# Altium PCB Lite Carrier for Mu.PcbDoc (part 14 of 15)
Units mm, origin at the board's own origin, x right, y up, seen from the top; angles counter-clockwise.
Board outline 146 x 102 mm, 20 copper layers (F.Cu, F.Mask, B.Cu, B.Mask, In1.Cu, F.SilkS, In2.Cu, B.SilkS, F.Adhes, B.Adhes, F.Paste, B.Paste, Dwgs.User, Cmts.User, Eco1.User, Eco2.User, Edge.Cuts, Margin, B.CrtYd, F.CrtYd); 254 components, 382 nets, 1258 pads, 1020 vias.
Unrouted connection lines stored in the file: 113.
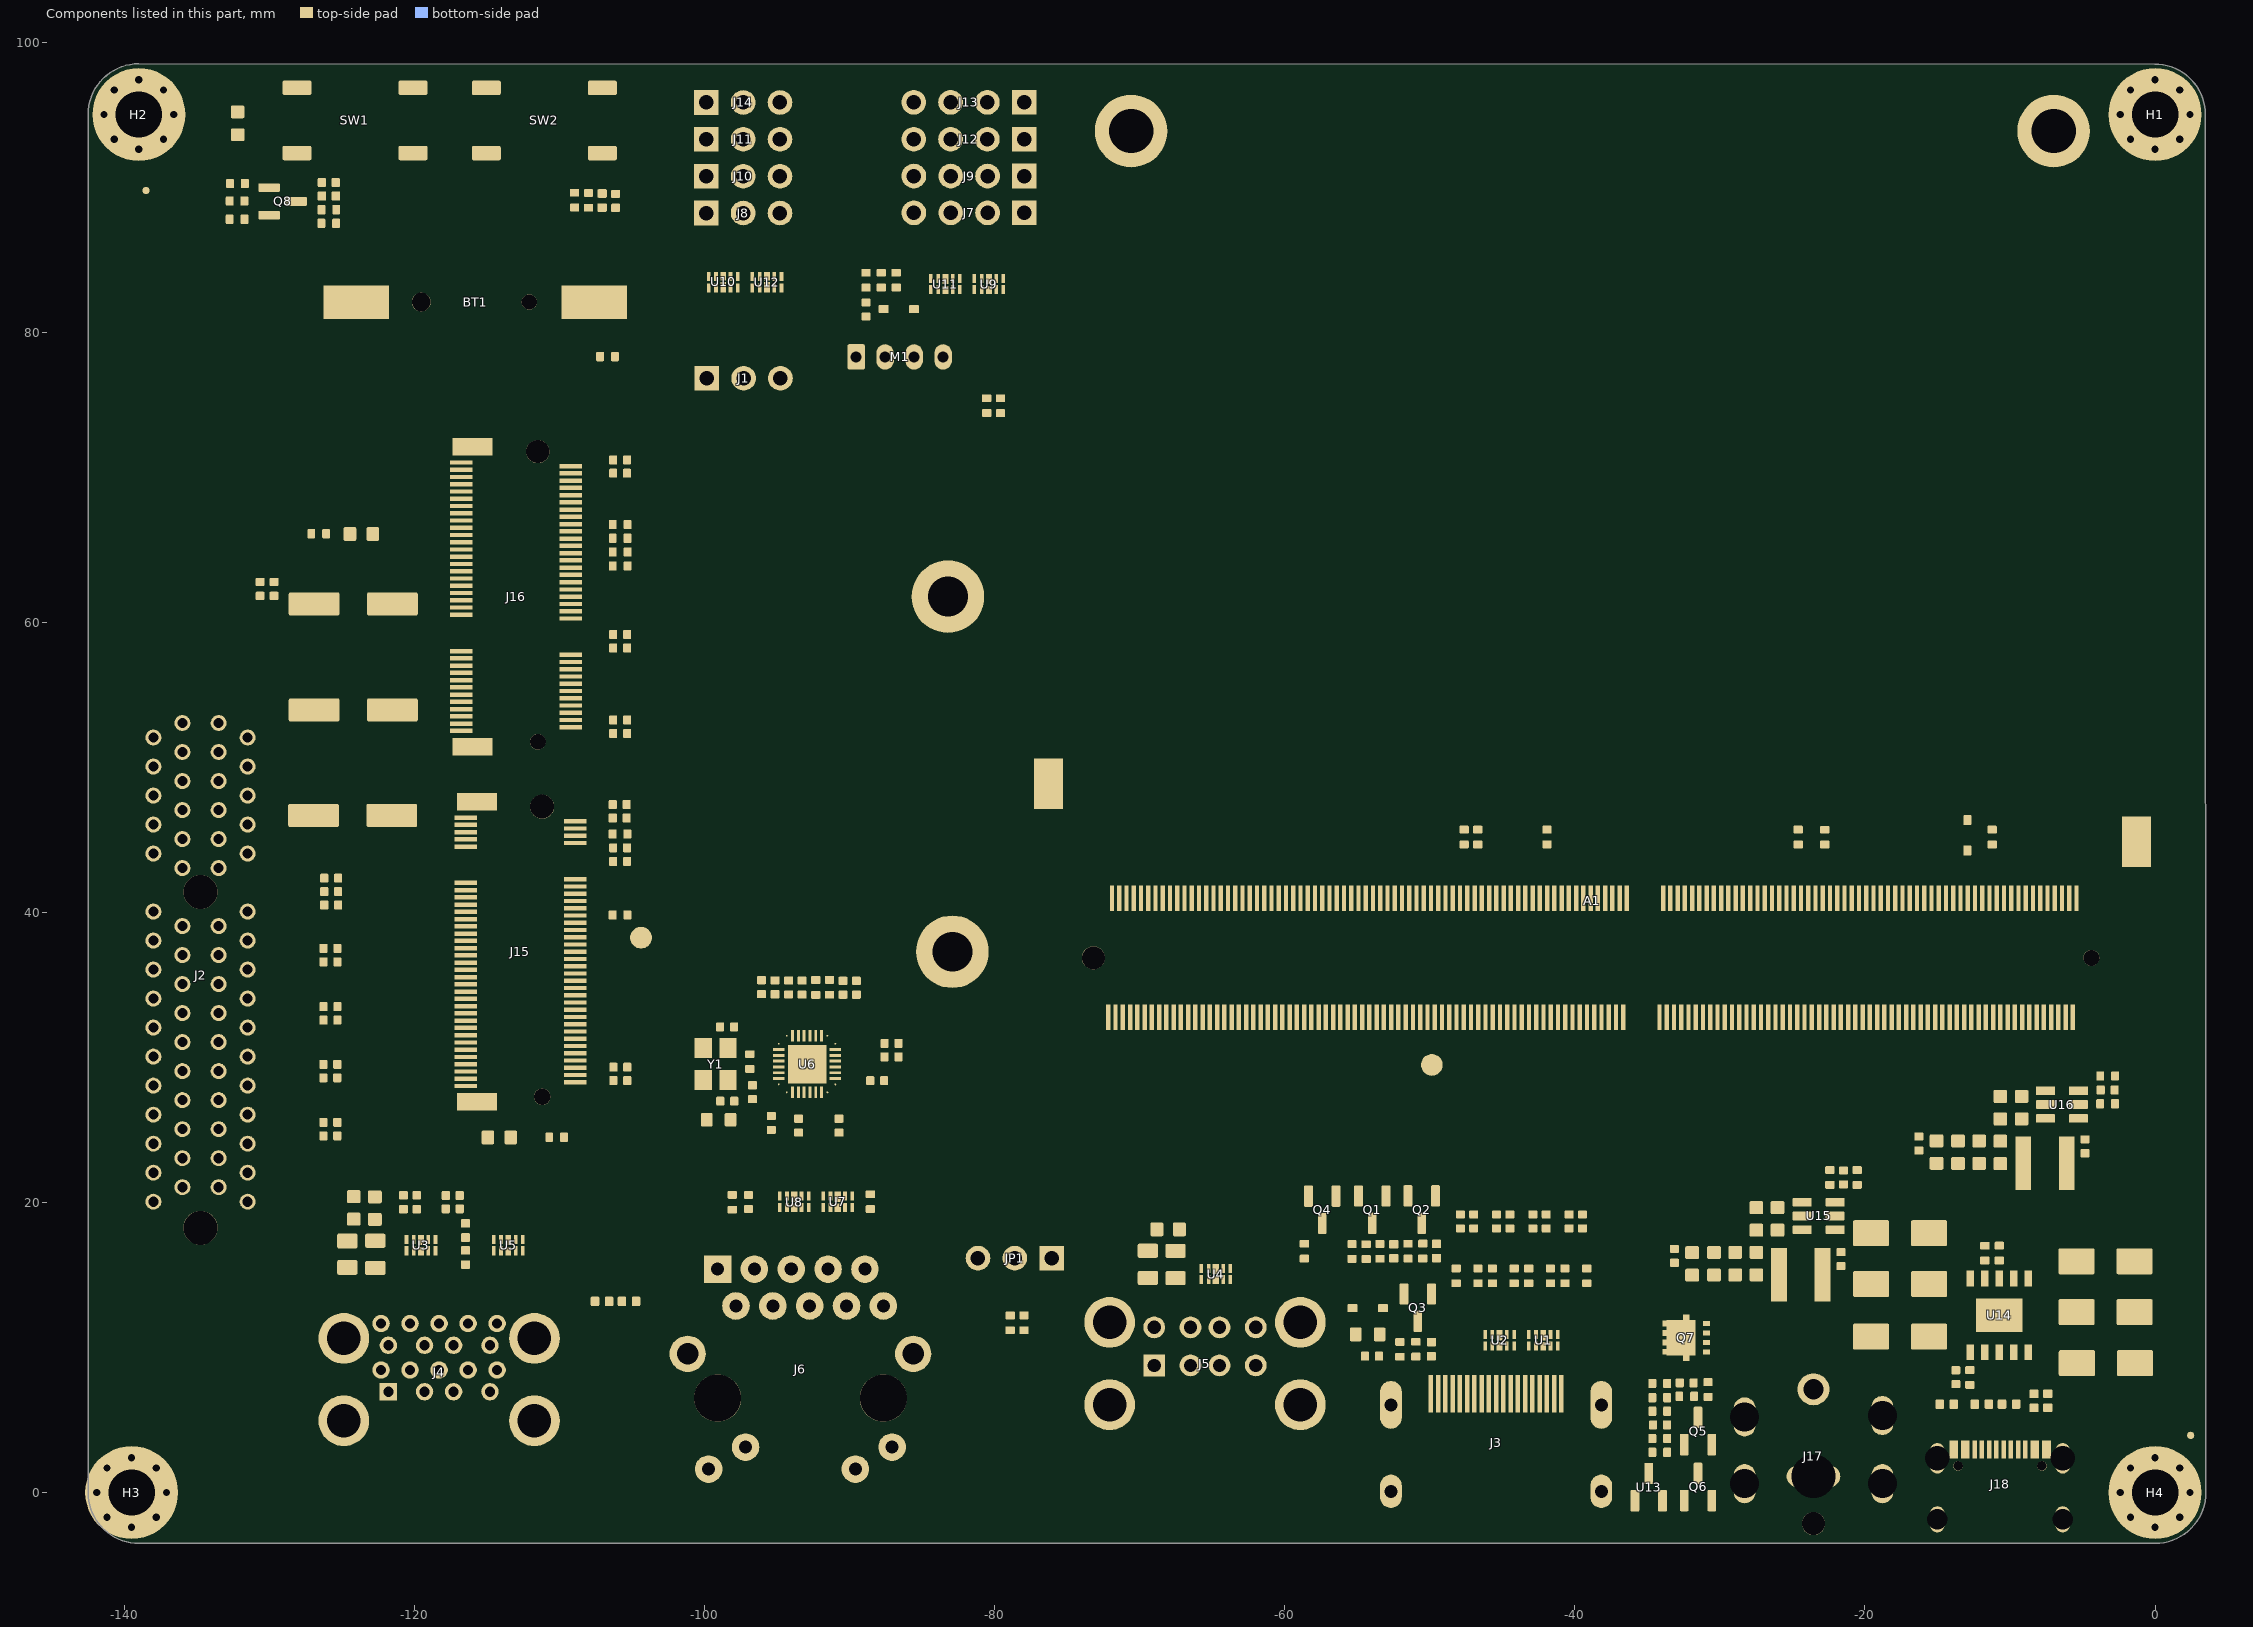
[diagram p24: the components of this part, seen from the top]

## Polygon pours and split planes (outlines as drawn) (continued)
GND on F.Cu "F.Cu-GND-48" (solid, remove dead copper, pour order 31874): 24 vertices, not listed, extent -8.355,33.791 -7.985,34.191
GND on F.Cu "F.Cu-GND-22" (solid, remove dead copper, pour order 31875): 24 vertices, not listed, extent -25.355,33.791 -24.985,34.191
GND on F.Cu "F.Cu-GND-58" (solid, remove dead copper, pour order 31876): 24 vertices, not listed, extent -11.355,33.791 -10.985,34.191
GND on F.Cu "F.Cu-GND-138" (solid, remove dead copper, pour order 31877): 24 vertices, not listed, extent -45.105,41.991 -44.735,42.391
+3V3 on F.Cu "F.Cu-+3V3" (solid, remove dead copper, pour order 31878): 24 vertices, not listed, extent -91.565,35.791 -91.195,36.191
GND on F.Cu "F.Cu-GND-24" (solid, remove dead copper, pour order 31879): 24 vertices, not listed, extent -13.095,41.992 -12.725,42.392
GND on F.Cu "F.Cu-GND-15" (solid, remove dead copper, pour order 31880): 24 vertices, not listed, extent -63.845,34.381 -63.475,34.781
GND on F.Cu "F.Cu-GND-28" (solid, remove dead copper, pour order 31881): 24 vertices, not listed, extent -115.498,67.393 -115.063,67.818
{\R\S\T\_\S\W\}\ on F.Cu "F.Cu-/LattePanda Module/~{RST_SW}" (solid, remove dead copper, pour order 31882): 24 vertices, not listed, extent -103.538,82.013 -103.103,82.438
GND on F.Cu "F.Cu-GND-118" (solid, remove dead copper, pour order 31883): 24 vertices, not listed, extent -60.468,34.152 -60.033,34.577
PWR_EN on F.Cu "F.Cu-/PSU/PWR_EN-6" (solid, remove dead copper, pour order 31884): 24 vertices, not listed, extent -7.725,28.331 -7.355,28.731
GND on F.Cu "F.Cu-GND-89" (solid, remove dead copper, pour order 31885): 24 vertices, not listed, extent -115.252,45.415 -114.849,45.785
+3V3 on F.Cu "F.Cu-+3V3-77" (solid, remove dead copper, pour order 31886): 24 vertices, not listed, extent -49.785,18.319 -49.415,18.718
GND on F.Cu "F.Cu-GND-60" (solid, remove dead copper, pour order 31887): 24 vertices, not listed, extent -116.178,64.815 -115.779,65.185
GND on F.Cu "F.Cu-GND-133" (solid, remove dead copper, pour order 31888): 24 vertices, not listed, extent -108.348,56.585 -107.949,56.955
GND on F.Cu "F.Cu-GND-107" (solid, remove dead copper, pour order 31889): 24 vertices, not listed, extent -116.168,53.835 -115.769,54.205
PWR_C_D- on F.Cu "F.Cu-/PSU/PWR_C_D--4" (solid, remove dead copper, pour order 31890): 24 vertices, not listed, extent -8.935,8.569 -8.565,8.968
GND on F.Cu "F.Cu-GND-160" (solid, remove dead copper, pour order 31891): 24 vertices, not listed, extent -116.178,52.335 -115.779,52.705
CC2 on F.Cu "F.Cu-/PSU/CC2-2" (solid, remove dead copper, pour order 31892): 24 vertices, not listed, extent -8.935,13.789 -8.565,14.188
GND on F.Cu "F.Cu-GND-3" (solid, remove dead copper, pour order 31893): 24 vertices, not listed, extent -115.968,66.335 -115.569,66.705
GND on F.Cu "F.Cu-GND-93" (solid, remove dead copper, pour order 31894): 24 vertices, not listed, extent -116.158,63.335 -115.759,63.705
{\W\A\K\E\}\ on F.Cu "F.Cu-/~{WAKE}-8" (solid, remove dead copper, pour order 31895): 24 vertices, not listed, extent -74.401,47.545 -74.002,47.915
{\C\L\K\R\E\Q\E\}\ on F.Cu "F.Cu-/M.2 E&M Key/~{CLKREQE}" (solid, remove dead copper, pour order 31896): 24 vertices, not listed, extent -107.081,63.685 -106.682,64.055
VPullup on F.Cu "F.Cu-VPullup" (solid, remove dead copper, pour order 31897): 24 vertices, not listed, extent -13.135,46.582 -12.765,46.981
{\P\L\T\_\R\S\T\}\ on F.Cu "F.Cu-/~{PLT_RST}-6" (solid, remove dead copper, pour order 31898): 24 vertices, not listed, extent -51.221,29.305 -50.822,29.675
FAN_1_TAC on F.Cu "F.Cu-/Fan_Temp/FAN_1_TAC-1" (solid, remove dead copper, pour order 31899): 24 vertices, not listed, extent -89.651,82.895 -89.252,83.265
GND on F.Cu "F.Cu-GND-34" (solid, remove dead copper, pour order 31900): 24 vertices, not listed, extent -93.795,24.279 -93.41,24.656
CC1 on F.Cu "F.Cu-/PSU/CC1-5" (solid, remove dead copper, pour order 31901): 24 vertices, not listed, extent -13.455,5.622 -13.085,6.091
GND on F.Cu "F.Cu-GND-92" (solid, remove dead copper, pour order 31902): 24 vertices, not listed, extent -91.18,18.162 -90.733,18.527
GND on F.Cu "F.Cu-GND-112" (solid, remove dead copper, pour order 31903): 24 vertices, not listed, extent -32.352,34.368 -31.933,34.807
{\P\W\R\_\L\E\D\}\{\s\l\a\s\h\}\{PSON} on F.Cu "F.Cu-/~{PWR_LED}{slash}~{PSON}-4" (solid, remove dead copper, pour order 31904): 24 vertices, not listed, extent -58.82,15.549 -58.45,15.947
GND on F.Cu "F.Cu-GND-84" (solid, remove dead copper, pour order 31905): 24 vertices, not listed, extent -62.335,34.383 -61.965,34.781
GND on F.Cu "F.Cu-GND-47" (solid, remove dead copper, pour order 31906): 24 vertices, not listed, extent -68.335,34.383 -67.965,34.781
GND on F.Cu "F.Cu-GND-11" (solid, remove dead copper, pour order 31907): 24 vertices, not listed, extent -47.365,33.643 -46.995,34.041
GND on F.Cu "F.Cu-GND-119" (solid, remove dead copper, pour order 31908): 24 vertices, not listed, extent -66.115,42.273 -65.745,42.671
PWR_C_D- on F.Cu "F.Cu-/PSU/PWR_C_D--2" (solid, remove dead copper, pour order 31909): 24 vertices, not listed, extent -11.655,6.483 -11.285,6.881
FAN_1_TAC on F.Cu "F.Cu-/Fan_Temp/FAN_1_TAC-4" (solid, remove dead copper, pour order 31910): 24 vertices, not listed, extent -85.135,81.814 -84.765,82.271
PWR_EN on F.Cu "F.Cu-/PSU/PWR_EN" (solid, remove dead copper, pour order 31911): 24 vertices, not listed, extent -78.185,7.359 -77.815,7.756
+3V3 on F.Cu "F.Cu-+3V3-29" (solid, remove dead copper, pour order 31912): 24 vertices, not listed, extent -109.125,87.469 -108.755,87.866
+12V on F.Cu "F.Cu-+12V-2" (solid, remove dead copper, pour order 31913): 24 vertices, not listed, extent -35.161,2.568 -34.764,2.937
GND on F.Cu "F.Cu-GND-183" (solid, remove dead copper, pour order 31914): 24 vertices, not listed, extent -101.117,28.954 -100.704,29.397
+3V3 on F.Cu "F.Cu-+3V3-52" (solid, remove dead copper, pour order 31915): 24 vertices, not listed, extent -79.501,74.164 -79.141,74.52
HSIO_8_TX- on F.Cu "F.Cu-/LattePanda Module/HSIO_8_TX--1" (solid, remove dead copper, pour order 31916): 24 vertices, not listed, extent -119.9,29.328 -119.499,29.698
+1V0 on F.Cu "F.Cu-+1V0-13" (solid, remove dead copper, pour order 31917): 24 vertices, not listed, extent -93.744,25.769 -93.251,26.18
I2C2_SCL on F.Cu "F.Cu-/GPIO/I2C2_SCL" (solid, remove dead copper, pour order 31918): 24 vertices, not listed, extent -82.475,81.973 -82.043,82.334
GND on F.Cu "F.Cu-GND-91" (solid, remove dead copper, pour order 31919): 24 vertices, not listed, extent -49.226,8.764 -48.83,9.101
LED2_ACT on F.Cu "F.Cu-/Gigabit Ethernet/LED2_ACT" (solid, remove dead copper, pour order 31920): 24 vertices, not listed, extent -96.21,30.618 -95.835,31.015
LED1_1000 on F.Cu "F.Cu-/Gigabit Ethernet/LED1_1000" (solid, remove dead copper, pour order 31921): 24 vertices, not listed, extent -95.827,30.223 -95.449,30.615
SOC_UART1_RX on F.Cu "F.Cu-/GPIO/SOC_UART1_RX-4" (solid, remove dead copper, pour order 31922): 24 vertices, not listed, extent -99.395,82.089 -99.025,82.49
+1V0 on F.Cu "F.Cu-+1V0-16" (solid, remove dead copper, pour order 31923): 24 vertices, not listed, extent -93.72,26.126 -93.35,26.527
I2C3_SCL on F.Cu "F.Cu-/GPIO/I2C3_SCL-3" (solid, remove dead copper, pour order 31924): 24 vertices, not listed, extent -83.085,82.039 -82.715,82.44
+BATT on F.Cu "F.Cu-+BATT-2" (solid, remove dead copper, pour order 31925): 24 vertices, not listed, extent -60.546,62.233 -60.133,62.646
{\P\W\R\_\L\E\D\}\{\s\l\a\s\h\}\{PSON} on F.Cu "F.Cu-/~{PWR_LED}{slash}~{PSON}-3" (solid, remove dead copper, pour order 31926): 24 vertices, not listed, extent -71.736,71.793 -71.323,72.206
+3V3 on F.Cu "F.Cu-+3V3-9" (solid, remove dead copper, pour order 31927): 24 vertices, not listed, extent -97.206,24.154 -96.793,24.567
{\P\L\T\_\R\S\T\}\ on F.Cu "F.Cu-/~{PLT_RST}" (solid, remove dead copper, pour order 31928): 24 vertices, not listed, extent -92.306,33.014 -91.893,33.427
I2C2_SCL on F.Cu "F.Cu-/GPIO/I2C2_SCL-3" (solid, remove dead copper, pour order 31929): 24 vertices, not listed, extent -82.406,84.244 -81.993,84.657
SOC_UART0_RX on F.Cu "F.Cu-/GPIO/SOC_UART0_RX-3" (solid, remove dead copper, pour order 31930): 24 vertices, not listed, extent -100.317,82.133 -99.904,82.546
+3V3 on F.Cu "F.Cu-+3V3-44" (solid, remove dead copper, pour order 31931): 24 vertices, not listed, extent -96.947,24.413 -96.534,24.826
+1V0 on F.Cu "F.Cu-+1V0-15" (solid, remove dead copper, pour order 31932): 24 vertices, not listed, extent -93.832,33.246 -93.419,33.659
{\P\W\R\_\L\E\D\}\{\s\l\a\s\h\}\{PSON} on F.Cu "F.Cu-/~{PWR_LED}{slash}~{PSON}" (solid, remove dead copper, pour order 31933): 24 vertices, not listed, extent -70.836,34.484 -70.423,34.897
I2C4_SCL on F.Cu "F.Cu-/GPIO/I2C4_SCL-3" (solid, remove dead copper, pour order 31934): 24 vertices, not listed, extent -84.085,82.059 -83.715,82.46
I2C3_SCL on F.Cu "F.Cu-/GPIO/I2C3_SCL-2" (solid, remove dead copper, pour order 31935): 24 vertices, not listed, extent -83.085,84.27 -82.715,84.671
SOC_UART0_TX on F.Cu "F.Cu-/GPIO/SOC_UART0_TX-2" (solid, remove dead copper, pour order 31936): 24 vertices, not listed, extent -96.885,84.63 -96.515,85.031
SOC_UART2_RX on F.Cu "F.Cu-/GPIO/SOC_UART2_RX" (solid, remove dead copper, pour order 31937): 24 vertices, not listed, extent -84.461,79.475 -84.06,79.845
SOC_UART1_TX on F.Cu "F.Cu-/GPIO/SOC_UART1_TX-2" (solid, remove dead copper, pour order 31938): 24 vertices, not listed, extent -60.227,74.274 -59.814,74.687
I2C2_SCL on F.Cu "F.Cu-/GPIO/I2C2_SCL-1" (solid, remove dead copper, pour order 31939): 24 vertices, not listed, extent -58.127,77.014 -57.714,77.427
SOC_UART2_TX on F.Cu "F.Cu-/GPIO/SOC_UART2_TX-3" (solid, remove dead copper, pour order 31940): 24 vertices, not listed, extent -91.297,77.814 -90.884,78.227
SOC_UART0_RX on F.Cu "F.Cu-/GPIO/SOC_UART0_RX-4" (solid, remove dead copper, pour order 31941): 24 vertices, not listed, extent -62.917,72.144 -62.504,72.557
SOC_UART1_RX on F.Cu "F.Cu-/GPIO/SOC_UART1_RX-1" (solid, remove dead copper, pour order 31942): 24 vertices, not listed, extent -62.927,75.814 -62.514,76.227
I2C4_SCL on F.Cu "F.Cu-/GPIO/I2C4_SCL-2" (solid, remove dead copper, pour order 31943): 24 vertices, not listed, extent -60.087,75.674 -59.674,76.087
+1V0 on F.Cu "F.Cu-+1V0-14" (solid, remove dead copper, pour order 31944): 24 vertices, not listed, extent -93.832,33.014 -93.46,33.399
+BATT on F.Cu "F.Cu-+BATT" (solid, remove dead copper, pour order 31945): 24 vertices, not listed, extent -43.855,36.961 -43.485,37.361
{\P\W\R\_\S\W\}\ on F.Cu "F.Cu-/LattePanda Module/~{PWR_SW}-1" (solid, remove dead copper, pour order 31946): 24 vertices, not listed, extent -72.355,34.431 -71.985,34.831
{\P\W\R\_\S\W\}\ on F.Cu "F.Cu-/LattePanda Module/~{PWR_SW}-2" (solid, remove dead copper, pour order 31947): 24 vertices, not listed, extent -123.958,88.245 -123.559,88.615
REFCLK2- on F.Cu "F.Cu-/LattePanda Module/REFCLK2--2" (solid, remove dead copper, pour order 31948): 24 vertices, not listed, extent -46.839,35.728 -46.479,36.069
HSIO_9_TX- on F.Cu "F.Cu-/LattePanda Module/HSIO_9_TX--1" (solid, remove dead copper, pour order 31949): 24 vertices, not listed, extent -120.959,27.972 -120.599,28.313
HSIO_10_TX- on F.Cu "F.Cu-/LattePanda Module/HSIO_10_TX--1" (solid, remove dead copper, pour order 31950): 24 vertices, not listed, extent -122.759,24.958 -122.399,25.299
HSIO_3_TX+ on F.Cu "F.Cu-/LattePanda Module/HSIO_3_TX+-1" (solid, remove dead copper, pour order 31951): 24 vertices, not listed, extent -77.189,54.388 -76.829,54.729
HSIO_1_TX- on F.Cu "F.Cu-/LattePanda Module/HSIO_1_TX--2" (solid, remove dead copper, pour order 31952): 24 vertices, not listed, extent -115.789,19.628 -115.429,19.969
GbE_PCIe_CLK+ on F.Cu "F.Cu-/Gigabit Ethernet/GbE_PCIe_CLK+" (solid, remove dead copper, pour order 31953): 24 vertices, not listed, extent -65.539,38.028 -65.179,38.369
HSIO_3_RX+ on F.Cu "F.Cu-/LattePanda Module/HSIO_3_RX+" (solid, remove dead copper, pour order 31954): 24 vertices, not listed, extent -77.199,55.968 -76.839,56.309
HSIO_3_TX- on F.Cu "F.Cu-/LattePanda Module/HSIO_3_TX-" (solid, remove dead copper, pour order 31955): 24 vertices, not listed, extent -77.189,54.831 -76.829,55.172
HSIO_10_TX+ on F.Cu "F.Cu-/LattePanda Module/HSIO_10_TX+-1" (solid, remove dead copper, pour order 31956): 24 vertices, not listed, extent -122.759,25.401 -122.399,25.742
GbE_PCIe_CLK- on F.Cu "F.Cu-/Gigabit Ethernet/GbE_PCIe_CLK-" (solid, remove dead copper, pour order 31957): 24 vertices, not listed, extent -65.539,38.471 -65.179,38.812
HSIO_3_RX- on F.Cu "F.Cu-/LattePanda Module/HSIO_3_RX--2" (solid, remove dead copper, pour order 31958): 24 vertices, not listed, extent -77.199,56.411 -76.839,56.752
HSIO_9_TX+ on F.Cu "F.Cu-/LattePanda Module/HSIO_9_TX+-1" (solid, remove dead copper, pour order 31959): 24 vertices, not listed, extent -120.959,28.415 -120.599,28.756
HSIO_1_TX+ on F.Cu "F.Cu-/LattePanda Module/HSIO_1_TX+-2" (solid, remove dead copper, pour order 31960): 24 vertices, not listed, extent -115.789,20.071 -115.429,20.412
REFCLK2+ on F.Cu "F.Cu-/LattePanda Module/REFCLK2+-1" (solid, remove dead copper, pour order 31961): 24 vertices, not listed, extent -120.439,38.965 -120.079,39.306
REFCLK2+ on F.Cu "F.Cu-/LattePanda Module/REFCLK2+" (solid, remove dead copper, pour order 31962): 24 vertices, not listed, extent -46.839,36.171 -46.479,36.512
HSIO_0_TX+ on F.Cu "F.Cu-/LattePanda Module/HSIO_0_TX+-2" (solid, remove dead copper, pour order 31963): 24 vertices, not listed, extent -119.289,21.971 -118.929,22.312
HSIO_2_RX+ on F.Cu "F.Cu-/LattePanda Module/HSIO_2_RX+-2" (solid, remove dead copper, pour order 31964): 24 vertices, not listed, extent -112.669,38.331 -112.309,38.672
HSIO_8_TX+ on F.Cu "F.Cu-/LattePanda Module/HSIO_8_TX+" (solid, remove dead copper, pour order 31965): 24 vertices, not listed, extent -119.859,29.815 -119.499,30.156
REFCLK0- on F.Cu "F.Cu-/LattePanda Module/REFCLK0-" (solid, remove dead copper, pour order 31966): 24 vertices, not listed, extent -60.549,48.231 -60.189,48.572
HSIO_0_TX- on F.Cu "F.Cu-/LattePanda Module/HSIO_0_TX-" (solid, remove dead copper, pour order 31967): 24 vertices, not listed, extent -79.521,21.528 -79.161,21.869
HSIO_1_TX- on F.Cu "F.Cu-/LattePanda Module/HSIO_1_TX--1" (solid, remove dead copper, pour order 31968): 24 vertices, not listed, extent -80.501,20.108 -80.141,20.449
USB_2_P7+ on F.Cu "F.Cu-/LattePanda Module/USB_2_P7+-2" (solid, remove dead copper, pour order 31969): 24 vertices, not listed, extent -104.811,48.708 -104.451,49.049
REFCLK0+ on F.Cu "F.Cu-/LattePanda Module/REFCLK0+-2" (solid, remove dead copper, pour order 31970): 24 vertices, not listed, extent -60.549,47.788 -60.189,48.129
HSIO_0_TX- on F.Cu "F.Cu-/LattePanda Module/HSIO_0_TX--2" (solid, remove dead copper, pour order 31971): 24 vertices, not listed, extent -119.289,21.528 -118.929,21.869
HSIO_2_RX- on F.Cu "F.Cu-/LattePanda Module/HSIO_2_RX--2" (solid, remove dead copper, pour order 31972): 24 vertices, not listed, extent -112.669,37.888 -112.309,38.229
REFCLK2- on F.Cu "F.Cu-/LattePanda Module/REFCLK2--1" (solid, remove dead copper, pour order 31973): 24 vertices, not listed, extent -120.439,38.522 -120.079,38.863
HSIO_2_RX- on F.Cu "F.Cu-/LattePanda Module/HSIO_2_RX--1" (solid, remove dead copper, pour order 31974): 24 vertices, not listed, extent -98.751,42.831 -98.391,43.172
HSIO_1_TX+ on F.Cu "F.Cu-/LattePanda Module/HSIO_1_TX+" (solid, remove dead copper, pour order 31975): 24 vertices, not listed, extent -80.501,20.551 -80.141,20.892
HSIO_9_RX- on F.Cu "F.Cu-/LattePanda Module/HSIO_9_RX-" (solid, remove dead copper, pour order 31976): 24 vertices, not listed, extent -60.614,36.389 -60.273,36.749
CON_USB4_D_P on F.Cu "F.Cu-/USB2.0&USB3.0/CON_USB4_D_P" (solid, remove dead copper, pour order 31977): 24 vertices, not listed, extent -115.899,16.742 -115.539,17.083
HSIO_8_RX- on F.Cu "F.Cu-/LattePanda Module/HSIO_8_RX-" (solid, remove dead copper, pour order 31978): 24 vertices, not listed, extent -62.114,36.389 -61.773,36.749
HSIO_2_TX- on F.Cu "F.Cu-/LattePanda Module/HSIO_2_TX--2" (solid, remove dead copper, pour order 31979): 24 vertices, not listed, extent -101.099,43.588 -100.739,43.929
CON_USB3_SSTX_N on F.Cu "F.Cu-/USB2.0&USB3.0/CON_USB3_SSTX_N-3" (solid, remove dead copper, pour order 31980): 24 vertices, not listed, extent -120.249,15.809 -119.908,16.169
CON_USB3_SSRX_N on F.Cu "F.Cu-/USB2.0&USB3.0/CON_USB3_SSRX_N-4" (solid, remove dead copper, pour order 31981): 24 vertices, not listed, extent -114.229,15.489 -113.888,15.849
HSIO_11_RX- on F.Cu "F.Cu-/LattePanda Module/HSIO_11_RX-" (solid, remove dead copper, pour order 31982): 24 vertices, not listed, extent -57.614,36.389 -57.273,36.749
GbE_PCIe_RX+ on F.Cu "F.Cu-/Gigabit Ethernet/GbE_PCIe_RX+-1" (solid, remove dead copper, pour order 31983): 24 vertices, not listed, extent -80.339,44.619 -79.998,44.979
HSIO_10_RX- on F.Cu "F.Cu-/LattePanda Module/HSIO_10_RX-" (solid, remove dead copper, pour order 31984): 24 vertices, not listed, extent -59.114,36.389 -58.773,36.749
USB_2_P7+ on F.Cu "F.Cu-/LattePanda Module/USB_2_P7+-1" (solid, remove dead copper, pour order 31985): 24 vertices, not listed, extent -115.369,52.868 -115.009,53.209
REFCLK0- on F.Cu "F.Cu-/LattePanda Module/REFCLK0--2" (solid, remove dead copper, pour order 31986): 24 vertices, not listed, extent -49.663,38.535 -49.267,38.909
USB_2_P7- on F.Cu "F.Cu-/LattePanda Module/USB_2_P7-" (solid, remove dead copper, pour order 31987): 24 vertices, not listed, extent -115.369,53.311 -115.009,53.652
HSIO_2_TX+ on F.Cu "F.Cu-/LattePanda Module/HSIO_2_TX+-2" (solid, remove dead copper, pour order 31988): 24 vertices, not listed, extent -101.099,44.031 -100.739,44.372
GbE_PCIe_RX- on F.Cu "F.Cu-/Gigabit Ethernet/GbE_PCIe_RX-" (solid, remove dead copper, pour order 31989): 24 vertices, not listed, extent -80.782,44.619 -80.441,44.979
HSIO_10_RX+ on F.Cu "F.Cu-/LattePanda Module/HSIO_10_RX+" (solid, remove dead copper, pour order 31990): 24 vertices, not listed, extent -59.557,36.389 -59.216,36.749
CON_USB4_D_N on F.Cu "F.Cu-/USB2.0&USB3.0/CON_USB4_D_N-3" (solid, remove dead copper, pour order 31991): 24 vertices, not listed, extent -115.899,17.185 -115.539,17.526
CON_USB3_SSTX_P on F.Cu "F.Cu-/USB2.0&USB3.0/CON_USB3_SSTX_P-2" (solid, remove dead copper, pour order 31992): 24 vertices, not listed, extent -120.692,15.809 -120.351,16.169
CON_USB3_SSRX_P on F.Cu "F.Cu-/USB2.0&USB3.0/CON_USB3_SSRX_P-1" (solid, remove dead copper, pour order 31993): 24 vertices, not listed, extent -114.672,15.489 -114.331,15.849
HSIO_11_RX+ on F.Cu "F.Cu-/LattePanda Module/HSIO_11_RX+" (solid, remove dead copper, pour order 31994): 24 vertices, not listed, extent -58.057,36.389 -57.716,36.749
HSIO_9_RX+ on F.Cu "F.Cu-/LattePanda Module/HSIO_9_RX+" (solid, remove dead copper, pour order 31995): 24 vertices, not listed, extent -61.057,36.389 -60.716,36.749
HSIO_8_RX+ on F.Cu "F.Cu-/LattePanda Module/HSIO_8_RX+" (solid, remove dead copper, pour order 31996): 24 vertices, not listed, extent -62.557,36.389 -62.216,36.749
HSIO_2_TX- on F.Cu "F.Cu-/LattePanda Module/HSIO_2_TX--1" (solid, remove dead copper, pour order 31997): 24 vertices, not listed, extent -65.864,36.991 -65.523,37.351
CON_USB3_D_N on F.Cu "F.Cu-/USB2.0&USB3.0/CON_USB3_D_N-3" (solid, remove dead copper, pour order 31998): 24 vertices, not listed, extent -106.089,13.971 -105.748,14.331
CON_USB4_D_P on F.Cu "F.Cu-/USB2.0&USB3.0/CON_USB4_D_P-1" (solid, remove dead copper, pour order 31999): 24 vertices, not listed, extent -83.171,18.708 -82.811,19.049
HSIO_3_RX- on F.Cu "F.Cu-/LattePanda Module/HSIO_3_RX--1" (solid, remove dead copper, pour order 32000): 24 vertices, not listed, extent -63.614,42.181 -63.273,42.541
GbE_PCIe_RX+ on F.Cu "F.Cu-/Gigabit Ethernet/GbE_PCIe_RX+" (solid, remove dead copper, pour order 32001): 24 vertices, not listed, extent -89.944,38.281 -89.603,38.641
HSIO_2_RX+ on F.Cu "F.Cu-/LattePanda Module/HSIO_2_RX+" (solid, remove dead copper, pour order 32002): 24 vertices, not listed, extent -98.751,42.388 -98.391,42.729
HSIO_3_TX- on F.Cu "F.Cu-/LattePanda Module/HSIO_3_TX--2" (solid, remove dead copper, pour order 32003): 24 vertices, not listed, extent -64.364,38.801 -64.023,39.161
CON_USB3_D_P on F.Cu "F.Cu-/USB2.0&USB3.0/CON_USB3_D_P-3" (solid, remove dead copper, pour order 32004): 24 vertices, not listed, extent -84.481,17.428 -84.121,17.769
REFCLK0+ on F.Cu "F.Cu-/LattePanda Module/REFCLK0+" (solid, remove dead copper, pour order 32005): 24 vertices, not listed, extent -49.855,38.727 -49.481,39.123
GbE_PCIe_CLK- on F.Cu "F.Cu-/Gigabit Ethernet/GbE_PCIe_CLK--1" (solid, remove dead copper, pour order 32006): 24 vertices, not listed, extent -49.039,42.747 -48.665,43.143
GbE_PCIe_CLK+ on F.Cu "F.Cu-/Gigabit Ethernet/GbE_PCIe_CLK+-1" (solid, remove dead copper, pour order 32007): 24 vertices, not listed, extent -49.253,42.555 -48.857,42.929
CON_USB4_D_N on F.Cu "F.Cu-/USB2.0&USB3.0/CON_USB4_D_N-4" (solid, remove dead copper, pour order 32008): 24 vertices, not listed, extent -83.171,19.151 -82.811,19.492
USB_2_P7- on F.Cu "F.Cu-/LattePanda Module/USB_2_P7--1" (solid, remove dead copper, pour order 32009): 24 vertices, not listed, extent -104.811,49.151 -104.451,49.492
HSIO_2_TX+ on F.Cu "F.Cu-/LattePanda Module/HSIO_2_TX+" (solid, remove dead copper, pour order 32010): 24 vertices, not listed, extent -66.307,36.991 -65.966,37.351
HSIO_3_RX+ on F.Cu "F.Cu-/LattePanda Module/HSIO_3_RX+-1" (solid, remove dead copper, pour order 32011): 24 vertices, not listed, extent -64.057,42.181 -63.716,42.541
HSIO_3_TX+ on F.Cu "F.Cu-/LattePanda Module/HSIO_3_TX+-2" (solid, remove dead copper, pour order 32012): 24 vertices, not listed, extent -64.807,38.801 -64.466,39.161
HSIO_0_TX+ on F.Cu "F.Cu-/LattePanda Module/HSIO_0_TX+" (solid, remove dead copper, pour order 32013): 24 vertices, not listed, extent -79.521,21.971 -79.161,22.312
CON_USB3_D_P on F.Cu "F.Cu-/USB2.0&USB3.0/CON_USB3_D_P-4" (solid, remove dead copper, pour order 32014): 24 vertices, not listed, extent -106.532,13.971 -106.191,14.331
CON_USB3_D_N on F.Cu "F.Cu-/USB2.0&USB3.0/CON_USB3_D_N-4" (solid, remove dead copper, pour order 32015): 24 vertices, not listed, extent -84.481,17.871 -84.121,18.212
GbE_PCIe_RX- on F.Cu "F.Cu-/Gigabit Ethernet/GbE_PCIe_RX--1" (solid, remove dead copper, pour order 32016): 24 vertices, not listed, extent -90.387,38.281 -90.046,38.641
SOC_UART0_TX on F.Cu "F.Cu-/GPIO/SOC_UART0_TX-3" (solid, remove dead copper, pour order 32017): 24 vertices, not listed, extent -64.707,76.286 -64.306,76.707
SOC_UART2_RX on F.Cu "F.Cu-/GPIO/SOC_UART2_RX-4" (solid, remove dead copper, pour order 32018): 24 vertices, not listed, extent -98.375,80.869 -98.005,81.266
SOC_UART0_TX on F.Cu "F.Cu-/GPIO/SOC_UART0_TX-1" (solid, remove dead copper, pour order 32019): 24 vertices, not listed, extent -96.905,81.669 -96.535,82.066
I2C3_SCL on F.Cu "F.Cu-/GPIO/I2C3_SCL-4" (solid, remove dead copper, pour order 32020): 24 vertices, not listed, extent -59.157,76.312 -58.762,76.737
SOC_UART1_TX on F.Cu "F.Cu-/GPIO/SOC_UART1_TX" (solid, remove dead copper, pour order 32021): 24 vertices, not listed, extent -96.362,82.132 -95.992,82.529
+1V0 on F.Cu "F.Cu-+1V0-12" (solid, remove dead copper, pour order 32022): 24 vertices, not listed, extent -90.92,25.77 -90.55,26.128
{\R\S\T\_\S\W\}\ on F.Cu "F.Cu-/LattePanda Module/~{RST_SW}-1" (solid, remove dead copper, pour order 32023): 24 vertices, not listed, extent -71.805,34.427 -71.436,34.819
GND on F.Cu "F.Cu-GND-20" (solid, remove dead copper, pour order 32024): 24 vertices, not listed, extent -23.265,33.915 -22.903,34.267
GND on F.Cu "F.Cu-GND-21" (solid, remove dead copper, pour order 32025): 24 vertices, not listed, extent -49.733,15.06 -49.335,15.59
CON_USB4_SSRX_N on F.Cu "F.Cu-/USB2.0&USB3.0/CON_USB4_SSRX_N-4" (solid, remove dead copper, pour order 32026): 24 vertices, not listed, extent -112.729,16.232 -112.482,16.687
CON_USB4_SSRX_N on F.Cu "F.Cu-/USB2.0&USB3.0/CON_USB4_SSRX_N" (solid, remove dead copper, pour order 32027): 24 vertices, not listed, extent -112.729,17.007 -112.482,17.462
CON_USB2_D_P on F.Cu "F.Cu-/USB2.0&USB3.0/CON_USB2_D_P-1" (solid, remove dead copper, pour order 32028): 24 vertices, not listed, extent -65.449,15.017 -65.202,15.472
CON_USB3_SSRX_N on F.Cu "F.Cu-/USB2.0&USB3.0/CON_USB3_SSRX_N-2" (solid, remove dead copper, pour order 32029): 24 vertices, not listed, extent -114.229,17.007 -113.982,17.462
CON_USB4_SSTX_N on F.Cu "F.Cu-/USB2.0&USB3.0/CON_USB4_SSTX_N-5" (solid, remove dead copper, pour order 32030): 24 vertices, not listed, extent -118.749,16.232 -118.502,16.687
CON_USB4_SSTX_N on F.Cu "F.Cu-/USB2.0&USB3.0/CON_USB4_SSTX_N-4" (solid, remove dead copper, pour order 32031): 24 vertices, not listed, extent -118.749,17.007 -118.502,17.462
CON_USB3_SSTX_N on F.Cu "F.Cu-/USB2.0&USB3.0/CON_USB3_SSTX_N-2" (solid, remove dead copper, pour order 32032): 24 vertices, not listed, extent -120.249,17.007 -120.002,17.462
CON_USB1_D_P on F.Cu "F.Cu-/USB2.0&USB3.0/CON_USB1_D_P-3" (solid, remove dead copper, pour order 32033): 24 vertices, not listed, extent -63.949,15.017 -63.702,15.472
CON_USB2_D_P on F.Cu "F.Cu-/USB2.0&USB3.0/CON_USB2_D_P" (solid, remove dead copper, pour order 32034): 24 vertices, not listed, extent -65.449,14.242 -65.202,14.697
CON_USB1_D_P on F.Cu "F.Cu-/USB2.0&USB3.0/CON_USB1_D_P-4" (solid, remove dead copper, pour order 32035): 24 vertices, not listed, extent -63.949,14.242 -63.702,14.697
CON_USB4_SSRX_N on F.Cu "F.Cu-/USB2.0&USB3.0/CON_USB4_SSRX_N-1" (solid, remove dead copper, pour order 32036): 24 vertices, not listed, extent -112.729,17.428 -112.482,17.882
CON_USB3_SSRX_N on F.Cu "F.Cu-/USB2.0&USB3.0/CON_USB3_SSRX_N-3" (solid, remove dead copper, pour order 32037): 24 vertices, not listed, extent -114.229,17.428 -113.982,17.882
CON_USB3_SSTX_N on F.Cu "F.Cu-/USB2.0&USB3.0/CON_USB3_SSTX_N-4" (solid, remove dead copper, pour order 32038): 24 vertices, not listed, extent -120.249,17.428 -120.002,17.882
CON_USB4_SSTX_N on F.Cu "F.Cu-/USB2.0&USB3.0/CON_USB4_SSTX_N-3" (solid, remove dead copper, pour order 32039): 24 vertices, not listed, extent -118.749,16.653 -118.502,17.107
CON_USB2_D_P on F.Cu "F.Cu-/USB2.0&USB3.0/CON_USB2_D_P-4" (solid, remove dead copper, pour order 32040): 24 vertices, not listed, extent -65.449,14.663 -65.202,15.118
CON_USB4_SSRX_N on F.Cu "F.Cu-/USB2.0&USB3.0/CON_USB4_SSRX_N-2" (solid, remove dead copper, pour order 32041): 24 vertices, not listed, extent -112.729,16.653 -112.482,17.107
CON_USB2_D_P on F.Cu "F.Cu-/USB2.0&USB3.0/CON_USB2_D_P-3" (solid, remove dead copper, pour order 32042): 24 vertices, not listed, extent -65.449,15.438 -65.202,15.893
CON_USB4_SSTX_N on F.Cu "F.Cu-/USB2.0&USB3.0/CON_USB4_SSTX_N" (solid, remove dead copper, pour order 32043): 24 vertices, not listed, extent -118.749,17.428 -118.502,17.882
CON_USB3_SSTX_N on F.Cu "F.Cu-/USB2.0&USB3.0/CON_USB3_SSTX_N-1" (solid, remove dead copper, pour order 32044): 24 vertices, not listed, extent -120.249,16.653 -120.002,17.107
CON_USB1_D_P on F.Cu "F.Cu-/USB2.0&USB3.0/CON_USB1_D_P-2" (solid, remove dead copper, pour order 32045): 24 vertices, not listed, extent -63.949,14.663 -63.702,15.118
CON_USB1_D_P on F.Cu "F.Cu-/USB2.0&USB3.0/CON_USB1_D_P-1" (solid, remove dead copper, pour order 32046): 24 vertices, not listed, extent -63.949,15.438 -63.702,15.893
CON_USB3_SSRX_N on F.Cu "F.Cu-/USB2.0&USB3.0/CON_USB3_SSRX_N" (solid, remove dead copper, pour order 32047): 24 vertices, not listed, extent -114.229,16.653 -113.982,17.107
CON_USB1_D_N on F.Cu "F.Cu-/USB2.0&USB3.0/CON_USB1_D_N-1" (solid, remove dead copper, pour order 32048): 24 vertices, not listed, extent -64.298,15.017 -64.051,15.472
CON_USB4_SSRX_P on F.Cu "F.Cu-/USB2.0&USB3.0/CON_USB4_SSRX_P-1" (solid, remove dead copper, pour order 32049): 24 vertices, not listed, extent -113.078,16.232 -112.831,16.687
CON_USB3_SSTX_P on F.Cu "F.Cu-/USB2.0&USB3.0/CON_USB3_SSTX_P-4" (solid, remove dead copper, pour order 32050): 24 vertices, not listed, extent -120.598,17.007 -120.351,17.462
CON_USB2_D_N on F.Cu "F.Cu-/USB2.0&USB3.0/CON_USB2_D_N-2" (solid, remove dead copper, pour order 32051): 24 vertices, not listed, extent -65.798,15.017 -65.551,15.472
CON_USB2_D_N on F.Cu "F.Cu-/USB2.0&USB3.0/CON_USB2_D_N" (solid, remove dead copper, pour order 32052): 24 vertices, not listed, extent -65.798,14.242 -65.551,14.697
CON_USB1_D_N on F.Cu "F.Cu-/USB2.0&USB3.0/CON_USB1_D_N-3" (solid, remove dead copper, pour order 32053): 24 vertices, not listed, extent -64.298,14.242 -64.051,14.697
CON_USB4_SSTX_P on F.Cu "F.Cu-/USB2.0&USB3.0/CON_USB4_SSTX_P-1" (solid, remove dead copper, pour order 32054): 24 vertices, not listed, extent -119.098,17.007 -118.851,17.462
CON_USB3_SSRX_P on F.Cu "F.Cu-/USB2.0&USB3.0/CON_USB3_SSRX_P-4" (solid, remove dead copper, pour order 32055): 24 vertices, not listed, extent -114.578,17.007 -114.331,17.462
CON_USB4_SSRX_P on F.Cu "F.Cu-/USB2.0&USB3.0/CON_USB4_SSRX_P-3" (solid, remove dead copper, pour order 32056): 24 vertices, not listed, extent -113.078,17.007 -112.831,17.462
CON_USB4_SSTX_P on F.Cu "F.Cu-/USB2.0&USB3.0/CON_USB4_SSTX_P-3" (solid, remove dead copper, pour order 32057): 24 vertices, not listed, extent -119.098,16.232 -118.851,16.687
CON_USB3_SSTX_N on F.Cu "F.Cu-/USB2.0&USB3.0/CON_USB3_SSTX_N-5" (solid, remove dead copper, pour order 32058): 24 vertices, not listed, extent -120.249,16.232 -120.002,16.687
CON_USB3_SSRX_N on F.Cu "F.Cu-/USB2.0&USB3.0/CON_USB3_SSRX_N-1" (solid, remove dead copper, pour order 32059): 24 vertices, not listed, extent -114.229,16.232 -113.982,16.687
CON_USB2_D_N on F.Cu "F.Cu-/USB2.0&USB3.0/CON_USB2_D_N-1" (solid, remove dead copper, pour order 32060): 24 vertices, not listed, extent -65.798,15.438 -65.551,15.893
CON_USB1_D_N on F.Cu "F.Cu-/USB2.0&USB3.0/CON_USB1_D_N" (solid, remove dead copper, pour order 32061): 24 vertices, not listed, extent -64.298,15.438 -64.051,15.893
CON_USB3_SSRX_P on F.Cu "F.Cu-/USB2.0&USB3.0/CON_USB3_SSRX_P-2" (solid, remove dead copper, pour order 32062): 24 vertices, not listed, extent -114.578,17.428 -114.331,17.882
CON_USB2_D_N on F.Cu "F.Cu-/USB2.0&USB3.0/CON_USB2_D_N-3" (solid, remove dead copper, pour order 32063): 24 vertices, not listed, extent -65.798,14.663 -65.551,15.118
CON_USB4_SSRX_P on F.Cu "F.Cu-/USB2.0&USB3.0/CON_USB4_SSRX_P-4" (solid, remove dead copper, pour order 32064): 24 vertices, not listed, extent -113.078,16.653 -112.831,17.107
CON_USB3_SSTX_P on F.Cu "F.Cu-/USB2.0&USB3.0/CON_USB3_SSTX_P-3" (solid, remove dead copper, pour order 32065): 24 vertices, not listed, extent -120.598,16.653 -120.351,17.107
CON_USB1_D_N on F.Cu "F.Cu-/USB2.0&USB3.0/CON_USB1_D_N-2" (solid, remove dead copper, pour order 32066): 24 vertices, not listed, extent -64.298,14.663 -64.051,15.118
CON_USB3_SSRX_P on F.Cu "F.Cu-/USB2.0&USB3.0/CON_USB3_SSRX_P" (solid, remove dead copper, pour order 32067): 24 vertices, not listed, extent -114.578,16.653 -114.331,17.107
CON_USB3_SSTX_P on F.Cu "F.Cu-/USB2.0&USB3.0/CON_USB3_SSTX_P" (solid, remove dead copper, pour order 32068): 24 vertices, not listed, extent -120.598,17.428 -120.351,17.882
CON_USB4_SSRX_P on F.Cu "F.Cu-/USB2.0&USB3.0/CON_USB4_SSRX_P" (solid, remove dead copper, pour order 32069): 24 vertices, not listed, extent -113.078,17.428 -112.831,17.882
CON_USB4_SSTX_P on F.Cu "F.Cu-/USB2.0&USB3.0/CON_USB4_SSTX_P" (solid, remove dead copper, pour order 32070): 24 vertices, not listed, extent -119.098,16.653 -118.851,17.107
CON_USB4_SSTX_P on F.Cu "F.Cu-/USB2.0&USB3.0/CON_USB4_SSTX_P-5" (solid, remove dead copper, pour order 32071): 24 vertices, not listed, extent -119.098,17.428 -118.851,17.882
CON_USB3_SSRX_P on F.Cu "F.Cu-/USB2.0&USB3.0/CON_USB3_SSRX_P-3" (solid, remove dead copper, pour order 32072): 24 vertices, not listed, extent -114.578,16.232 -114.331,16.687
CON_USB3_SSTX_P on F.Cu "F.Cu-/USB2.0&USB3.0/CON_USB3_SSTX_P-1" (solid, remove dead copper, pour order 32073): 24 vertices, not listed, extent -120.598,16.232 -120.351,16.687
GND on F.Cu "F.Cu-GND-40" (solid, remove dead copper, pour order 32074): 24 vertices, not listed, extent -90.81,24.309 -90.409,24.633
Net-(Q7-G) on F.Cu "F.Cu-Net-(Q7-G)" (solid, remove dead copper, pour order 32075): 24 vertices, not listed, extent -31.09,11.649 -30.74,12
+12V on F.Cu "F.Cu-+12V" (solid, remove dead copper, pour order 32076): 24 vertices, not listed, extent -31.095,9.35 -30.745,9.701
HSO- on F.Cu "F.Cu-/Gigabit Ethernet/HSO-" (solid, remove dead copper, pour order 32077): 24 vertices, not listed, extent -91.984,31.482 -91.786,31.987
HSI- on F.Cu "F.Cu-/Gigabit Ethernet/HSI--1" (solid, remove dead copper, pour order 32078): 24 vertices, not listed, extent -90.992,29.991 -90.488,30.189
GbE_PCIe_CLK+ on F.Cu "F.Cu-/Gigabit Ethernet/GbE_PCIe_CLK+-2" (solid, remove dead copper, pour order 32079): 24 vertices, not listed, extent -90.992,30.49 -90.488,30.689
HSI+ on F.Cu "F.Cu-/Gigabit Ethernet/HSI+-1" (solid, remove dead copper, pour order 32080): 24 vertices, not listed, extent -90.992,29.69 -90.488,29.889
TMDS_CK- on F.Cu "F.Cu-/HDMI/TMDS_CK--3" (solid, remove dead copper, pour order 32081): 24 vertices, not listed, extent -46.315,10.109 -46.065,10.547
TMDS_CK+ on F.Cu "F.Cu-/HDMI/TMDS_CK+-2" (solid, remove dead copper, pour order 32082): 24 vertices, not listed, extent -45.815,10.884 -45.565,11.322
TMDS_CK+ on F.Cu "F.Cu-/HDMI/TMDS_CK+" (solid, remove dead copper, pour order 32083): 24 vertices, not listed, extent -45.815,10.109 -45.565,10.547
TMDS_D2+ on F.Cu "F.Cu-/HDMI/TMDS_D2+-7" (solid, remove dead copper, pour order 32084): 24 vertices, not listed, extent -41.305,10.109 -41.055,10.547
TMDS_D0+ on F.Cu "F.Cu-/HDMI/TMDS_D0+-3" (solid, remove dead copper, pour order 32085): 24 vertices, not listed, extent -44.315,10.884 -44.065,11.322
TMDS_D1+ on F.Cu "F.Cu-/HDMI/TMDS_D1+-3" (solid, remove dead copper, pour order 32086): 24 vertices, not listed, extent -42.805,10.884 -42.555,11.322
TMDS_D1- on F.Cu "F.Cu-/HDMI/TMDS_D1--3" (solid, remove dead copper, pour order 32087): 24 vertices, not listed, extent -43.305,10.884 -43.055,11.322
TMDS_D2- on F.Cu "F.Cu-/HDMI/TMDS_D2-" (solid, remove dead copper, pour order 32088): 24 vertices, not listed, extent -41.805,10.884 -41.555,11.322
TMDS_D0- on F.Cu "F.Cu-/HDMI/TMDS_D0--3" (solid, remove dead copper, pour order 32089): 24 vertices, not listed, extent -44.815,10.109 -44.565,10.547
TMDS_D1- on F.Cu "F.Cu-/HDMI/TMDS_D1--4" (solid, remove dead copper, pour order 32090): 24 vertices, not listed, extent -43.305,10.109 -43.055,10.547
TMDS_D2+ on F.Cu "F.Cu-/HDMI/TMDS_D2+-3" (solid, remove dead copper, pour order 32091): 24 vertices, not listed, extent -41.305,10.884 -41.055,11.322
TMDS_D2- on F.Cu "F.Cu-/HDMI/TMDS_D2--1" (solid, remove dead copper, pour order 32092): 24 vertices, not listed, extent -41.805,10.109 -41.555,10.547
TMDS_D0- on F.Cu "F.Cu-/HDMI/TMDS_D0--4" (solid, remove dead copper, pour order 32093): 24 vertices, not listed, extent -44.815,10.884 -44.565,11.322
TMDS_D1+ on F.Cu "F.Cu-/HDMI/TMDS_D1+-2" (solid, remove dead copper, pour order 32094): 24 vertices, not listed, extent -42.805,10.109 -42.555,10.547
TMDS_D0+ on F.Cu "F.Cu-/HDMI/TMDS_D0+-1" (solid, remove dead copper, pour order 32095): 24 vertices, not listed, extent -44.315,10.109 -44.065,10.547
TMDS_CK- on F.Cu "F.Cu-/HDMI/TMDS_CK--6" (solid, remove dead copper, pour order 32096): 24 vertices, not listed, extent -46.315,10.884 -46.065,11.322
TMDS_D2+ on F.Cu "F.Cu-/HDMI/TMDS_D2+-5" (solid, remove dead copper, pour order 32097): 24 vertices, not listed, extent -41.305,9.673 -41.055,10.111
TMDS_D1- on F.Cu "F.Cu-/HDMI/TMDS_D1--1" (solid, remove dead copper, pour order 32098): 24 vertices, not listed, extent -43.305,10.448 -43.055,10.886
TMDS_D2+ on F.Cu "F.Cu-/HDMI/TMDS_D2+-6" (solid, remove dead copper, pour order 32099): 24 vertices, not listed, extent -41.305,10.448 -41.055,10.886
TMDS_D1+ on F.Cu "F.Cu-/HDMI/TMDS_D1+-1" (solid, remove dead copper, pour order 32100): 24 vertices, not listed, extent -42.805,10.448 -42.555,10.886
TMDS_CK+ on F.Cu "F.Cu-/HDMI/TMDS_CK+-7" (solid, remove dead copper, pour order 32101): 24 vertices, not listed, extent -45.815,9.673 -45.565,10.111
TMDS_D1- on F.Cu "F.Cu-/HDMI/TMDS_D1-" (solid, remove dead copper, pour order 32102): 24 vertices, not listed, extent -43.305,9.673 -43.055,10.111
TMDS_CK+ on F.Cu "F.Cu-/HDMI/TMDS_CK+-4" (solid, remove dead copper, pour order 32103): 24 vertices, not listed, extent -45.815,10.448 -45.565,10.886
TMDS_D0+ on F.Cu "F.Cu-/HDMI/TMDS_D0+-6" (solid, remove dead copper, pour order 32104): 24 vertices, not listed, extent -44.315,9.673 -44.065,10.111
TMDS_D0+ on F.Cu "F.Cu-/HDMI/TMDS_D0+-7" (solid, remove dead copper, pour order 32105): 24 vertices, not listed, extent -44.315,10.448 -44.065,10.886
TMDS_D0- on F.Cu "F.Cu-/HDMI/TMDS_D0--1" (solid, remove dead copper, pour order 32106): 24 vertices, not listed, extent -44.815,10.448 -44.565,10.886
TMDS_CK- on F.Cu "F.Cu-/HDMI/TMDS_CK--1" (solid, remove dead copper, pour order 32107): 24 vertices, not listed, extent -46.315,10.448 -46.065,10.886
TMDS_CK- on F.Cu "F.Cu-/HDMI/TMDS_CK--4" (solid, remove dead copper, pour order 32108): 24 vertices, not listed, extent -46.315,9.673 -46.065,10.111
TMDS_D1+ on F.Cu "F.Cu-/HDMI/TMDS_D1+-4" (solid, remove dead copper, pour order 32109): 24 vertices, not listed, extent -42.805,9.673 -42.555,10.111
TMDS_D2- on F.Cu "F.Cu-/HDMI/TMDS_D2--7" (solid, remove dead copper, pour order 32110): 24 vertices, not listed, extent -41.805,10.448 -41.555,10.886
TMDS_D2- on F.Cu "F.Cu-/HDMI/TMDS_D2--4" (solid, remove dead copper, pour order 32111): 24 vertices, not listed, extent -41.805,9.673 -41.555,10.111
TMDS_D0- on F.Cu "F.Cu-/HDMI/TMDS_D0--5" (solid, remove dead copper, pour order 32112): 24 vertices, not listed, extent -44.815,9.673 -44.565,10.111
Net-(U10-NC-Pad6) on F.Cu "F.Cu-Net-(U10-NC-Pad6)-1" (solid, remove dead copper, pour order 32113): 24 vertices, not listed, extent -97.835,83.054 -97.585,83.493
Net-(U12-NC-Pad6) on F.Cu "F.Cu-Net-(U12-NC-Pad6)" (solid, remove dead copper, pour order 32114): 24 vertices, not listed, extent -94.825,83.052 -94.575,83.49
Net-(U12-NC-Pad6) on F.Cu "F.Cu-Net-(U12-NC-Pad6)-1" (solid, remove dead copper, pour order 32115): 24 vertices, not listed, extent -94.825,83.39 -94.575,83.828
Net-(U10-NC-Pad6) on F.Cu "F.Cu-Net-(U10-NC-Pad6)" (solid, remove dead copper, pour order 32116): 24 vertices, not listed, extent -97.835,83.393 -97.585,83.831
SOC_UART0_RX on F.Cu "F.Cu-/GPIO/SOC_UART0_RX-2" (solid, remove dead copper, pour order 32117): 24 vertices, not listed, extent -99.85,82.6 -99.649,83.066
MDI0- on F.Cu "F.Cu-/Gigabit Ethernet/MDI0-" (solid, remove dead copper, pour order 32118): 24 vertices, not listed, extent -94.084,27.107 -93.909,27.6
MDI2- on F.Cu "F.Cu-/Gigabit Ethernet/MDI2-" (solid, remove dead copper, pour order 32119): 24 vertices, not listed, extent -92.084,27.107 -91.909,27.6
MDI1- on F.Cu "F.Cu-/Gigabit Ethernet/MDI1-" (solid, remove dead copper, pour order 32120): 24 vertices, not listed, extent -92.884,27.107 -92.709,27.6
MDI2+ on F.Cu "F.Cu-/Gigabit Ethernet/MDI2+" (solid, remove dead copper, pour order 32121): 24 vertices, not listed, extent -92.361,27.107 -92.186,27.6
MDI1+ on F.Cu "F.Cu-/Gigabit Ethernet/MDI1+" (solid, remove dead copper, pour order 32122): 24 vertices, not listed, extent -93.161,27.107 -92.986,27.6
SOC_UART2_RX on F.Cu "F.Cu-/GPIO/SOC_UART2_RX-3" (solid, remove dead copper, pour order 32123): 24 vertices, not listed, extent -98.335,83.054 -98.085,83.493
I2C2_SDA on F.Cu "F.Cu-/GPIO/I2C2_SDA-2" (solid, remove dead copper, pour order 32124): 24 vertices, not listed, extent -79.525,82.932 -79.275,83.37
I2C3_SCL on F.Cu "F.Cu-/GPIO/I2C3_SCL-6" (solid, remove dead copper, pour order 32125): 24 vertices, not listed, extent -83.025,82.932 -82.775,83.37
SOC_UART0_TX on F.Cu "F.Cu-/GPIO/SOC_UART0_TX" (solid, remove dead copper, pour order 32126): 24 vertices, not listed, extent -96.825,83.052 -96.575,83.49
SOC_UART2_TX on F.Cu "F.Cu-/GPIO/SOC_UART2_TX" (solid, remove dead copper, pour order 32127): 24 vertices, not listed, extent -95.325,83.052 -95.075,83.49
I2C3_SDA on F.Cu "F.Cu-/GPIO/I2C3_SDA-1" (solid, remove dead copper, pour order 32128): 24 vertices, not listed, extent -80.025,82.932 -79.775,83.37
I2C4_SCL on F.Cu "F.Cu-/GPIO/I2C4_SCL-1" (solid, remove dead copper, pour order 32129): 24 vertices, not listed, extent -84.025,82.932 -83.775,83.37
I2C4_SDA on F.Cu "F.Cu-/GPIO/I2C4_SDA" (solid, remove dead copper, pour order 32130): 24 vertices, not listed, extent -81.025,82.932 -80.775,83.37
I2C5_SCL on F.Cu "F.Cu-/GPIO/I2C5_SCL-1" (solid, remove dead copper, pour order 32131): 24 vertices, not listed, extent -84.525,83.707 -84.275,84.145
I2C2_SCL on F.Cu "F.Cu-/GPIO/I2C2_SCL-4" (solid, remove dead copper, pour order 32132): 24 vertices, not listed, extent -82.525,82.932 -82.275,83.37
I2C5_SDA on F.Cu "F.Cu-/GPIO/I2C5_SDA-1" (solid, remove dead copper, pour order 32133): 24 vertices, not listed, extent -81.525,82.932 -81.275,83.37
I2C5_SCL on F.Cu "F.Cu-/GPIO/I2C5_SCL-4" (solid, remove dead copper, pour order 32134): 24 vertices, not listed, extent -84.525,82.932 -84.275,83.37
SOC_UART1_TX on F.Cu "F.Cu-/GPIO/SOC_UART1_TX-1" (solid, remove dead copper, pour order 32135): 24 vertices, not listed, extent -96.325,83.052 -96.075,83.49
I2C3_SCL on F.Cu "F.Cu-/GPIO/I2C3_SCL" (solid, remove dead copper, pour order 32136): 24 vertices, not listed, extent -83.025,83.707 -82.775,84.145
SOC_UART0_RX on F.Cu "F.Cu-/GPIO/SOC_UART0_RX-1" (solid, remove dead copper, pour order 32137): 24 vertices, not listed, extent -99.835,83.054 -99.585,83.493
SOC_UART1_RX on F.Cu "F.Cu-/GPIO/SOC_UART1_RX" (solid, remove dead copper, pour order 32138): 24 vertices, not listed, extent -99.335,83.054 -99.085,83.493
I2C4_SCL on F.Cu "F.Cu-/GPIO/I2C4_SCL" (solid, remove dead copper, pour order 32139): 24 vertices, not listed, extent -84.025,82.495 -83.775,82.933
SOC_UART1_TX on F.Cu "F.Cu-/GPIO/SOC_UART1_TX-3" (solid, remove dead copper, pour order 32140): 24 vertices, not listed, extent -96.325,82.615 -96.075,83.053
I2C5_SCL on F.Cu "F.Cu-/GPIO/I2C5_SCL" (solid, remove dead copper, pour order 32141): 24 vertices, not listed, extent -84.525,83.27 -84.275,83.708
I2C5_SCL on F.Cu "F.Cu-/GPIO/I2C5_SCL-3" (solid, remove dead copper, pour order 32142): 24 vertices, not listed, extent -84.525,82.495 -84.275,82.933
SOC_UART1_RX on F.Cu "F.Cu-/GPIO/SOC_UART1_RX-3" (solid, remove dead copper, pour order 32143): 24 vertices, not listed, extent -99.335,82.618 -99.085,83.056
SOC_UART2_RX on F.Cu "F.Cu-/GPIO/SOC_UART2_RX-1" (solid, remove dead copper, pour order 32144): 24 vertices, not listed, extent -98.335,82.618 -98.085,83.056
SOC_UART0_TX on F.Cu "F.Cu-/GPIO/SOC_UART0_TX-4" (solid, remove dead copper, pour order 32145): 24 vertices, not listed, extent -96.825,82.615 -96.575,83.053
SOC_UART2_TX on F.Cu "F.Cu-/GPIO/SOC_UART2_TX-1" (solid, remove dead copper, pour order 32146): 24 vertices, not listed, extent -95.325,82.615 -95.075,83.053
I2C5_SDA on F.Cu "F.Cu-/GPIO/I2C5_SDA" (solid, remove dead copper, pour order 32147): 24 vertices, not listed, extent -81.525,82.495 -81.275,82.933
I2C3_SDA on F.Cu "F.Cu-/GPIO/I2C3_SDA" (solid, remove dead copper, pour order 32148): 24 vertices, not listed, extent -80.025,82.495 -79.775,82.933
I2C2_SCL on F.Cu "F.Cu-/GPIO/I2C2_SCL-2" (solid, remove dead copper, pour order 32149): 24 vertices, not listed, extent -82.525,82.495 -82.275,82.933
I2C2_SDA on F.Cu "F.Cu-/GPIO/I2C2_SDA" (solid, remove dead copper, pour order 32150): 24 vertices, not listed, extent -79.525,82.495 -79.275,82.933
I2C3_SCL on F.Cu "F.Cu-/GPIO/I2C3_SCL-5" (solid, remove dead copper, pour order 32151): 24 vertices, not listed, extent -83.025,83.27 -82.775,83.708
I2C3_SCL on F.Cu "F.Cu-/GPIO/I2C3_SCL-1" (solid, remove dead copper, pour order 32152): 24 vertices, not listed, extent -83.025,82.495 -82.775,82.933
I2C4_SDA on F.Cu "F.Cu-/GPIO/I2C4_SDA-2" (solid, remove dead copper, pour order 32153): 24 vertices, not listed, extent -81.025,82.495 -80.775,82.933
MDI3- on F.Cu "F.Cu-/Gigabit Ethernet/MDI3--1" (solid, remove dead copper, pour order 32154): 24 vertices, not listed, extent -90.995,28.391 -90.502,28.566
{\P\L\T\_\R\S\T\}\ on F.Cu "F.Cu-/~{PLT_RST}-5" (solid, remove dead copper, pour order 32155): 24 vertices, not listed, extent -92.435,31.489 -92.235,31.99
+1V0 on F.Cu "F.Cu-+1V0-8" (solid, remove dead copper, pour order 32156): 24 vertices, not listed, extent -93.635,31.489 -93.435,31.99
Net-(U6-LANWAKEB) on F.Cu "F.Cu-Net-(U6-LANWAKEB)-1" (solid, remove dead copper, pour order 32157): 24 vertices, not listed, extent -93.235,31.489 -93.035,31.99
+3V3 on F.Cu "F.Cu-+3V3-49" (solid, remove dead copper, pour order 32158): 24 vertices, not listed, extent -94.035,31.489 -93.835,31.99
Net-(U6-ISOLATEB) on F.Cu "F.Cu-Net-(U6-ISOLATEB)-1" (solid, remove dead copper, pour order 32159): 24 vertices, not listed, extent -92.835,31.489 -92.635,31.99
+1V0 on F.Cu "F.Cu-+1V0-4" (solid, remove dead copper, pour order 32160): 24 vertices, not listed, extent -93.635,27.09 -93.435,27.591
+3V3 on F.Cu "F.Cu-+3V3-38" (solid, remove dead copper, pour order 32161): 24 vertices, not listed, extent -109.106,27.98 -108.799,28.281
Net-(U6-CKXTAL1) on F.Cu "F.Cu-Net-(U6-CKXTAL1)-5" (solid, remove dead copper, pour order 32162): 24 vertices, not listed, extent -95.385,29.64 -94.884,29.84
LED1_1000 on F.Cu "F.Cu-/Gigabit Ethernet/LED1_1000-1" (solid, remove dead copper, pour order 32163): 24 vertices, not listed, extent -95.385,30.44 -94.884,30.64
Net-(U6-RSET) on F.Cu "F.Cu-Net-(U6-RSET)-1" (solid, remove dead copper, pour order 32164): 24 vertices, not listed, extent -95.385,28.44 -94.884,28.64
Net-(U6-CKXTAL2) on F.Cu "F.Cu-Net-(U6-CKXTAL2)" (solid, remove dead copper, pour order 32165): 24 vertices, not listed, extent -95.385,29.24 -94.884,29.44
+3V3 on F.Cu "F.Cu-+3V3-16" (solid, remove dead copper, pour order 32166): 24 vertices, not listed, extent -94.595,33.167 -94.285,33.332
+1V0 on F.Cu "F.Cu-+1V0-1" (solid, remove dead copper, pour order 32167): 24 vertices, not listed, extent -95.333,33.147 -95.07,33.29
GND on F.Cu "F.Cu-GND-136" (solid, remove dead copper, pour order 32168): 24 vertices, not listed, extent -16.111,42.304 -15.815,42.467
GND on B.Cu "B.Cu-GND" (solid, remove dead copper, pour order 30952): 3.566,32.271 -20.243,32.287 -20.281,23.019 -38.352,23.048 -38.566,-3.426 3.49,-3.49
+15V on B.Cu "B.Cu-+15V" (solid, remove dead copper, pour order 30955): -15.42,3.77 -6.06,3.77 -6.06,5.45 -16.15,5.45 -16.15,4.5
GND on B.Cu "B.Cu-GND-1" (solid, remove dead copper, pour order 30958): -142.44,-3.53 -37.274,-3.494 -37.187,23.421 -20.213,23.467 -13.337,31.018 3.497,30.97 3.49,98.5 -142.5,98.5
VDC on B.Cu "B.Cu-VDC-1" (solid, remove dead copper, pour order 30963): -20.86,22.28 -20.04,21.23 -4.81,21.2 -4.81,17.54 -20.899,17.54 -22.694,19.56 -29.07,19.537 -29.07,22.297
+12VA on B.Cu "B.Cu-+12VA-1" (solid, remove dead copper, pour order 30964): -36.951,20.024 -33.394,20.024 -33.394,22.572 -36.941,22.572 -36.951,22.562
+5V on B.Cu "B.Cu-+5V-1" (solid, remove dead copper, pour order 30966): -33.033,15.1 -29.27,15.1 -29.27,13.952 -29.28,13.95 -32.89,13.95 -33.05,14.11 -33.05,15.01
+5V on B.Cu "B.Cu-+5V" (solid, remove dead copper, pour order 30968): -70.57,16.98 -71.58,17.01 -71.59,15.46 -70.52,15.45 -70.52,16.145 -68.525,16.145 -68.525,17.93 -69.62,17.93
+3V3 on B.Cu "B.Cu-+3V3-3" (solid, remove dead copper, pour order 30971): -15.62,23.19 -16.5,23.98 -19.37,23.99 -19.37,21.46 -15.61,21.46
+12VA on B.Cu "B.Cu-+12VA" (solid, remove dead copper, pour order 30974): 19 vertices, not listed, extent -139.075,50.502 -125.112,62.082
+3V3 on B.Cu "B.Cu-+3V3-15" (solid, remove dead copper, pour order 30979): -121.67,65.46 -118.39,65.46 -118.39,63.32 -121.67,63.32
+12V on B.Cu "B.Cu-+12V" (solid, remove dead copper, pour order 30988): 24 vertices, not listed, extent -24.55,7.109 -22.55,8.71
+12V on B.Cu "B.Cu-+12V-1" (solid, remove dead copper, pour order 30992): 24 vertices, not listed, extent -24.473,8.796 -23.03,10.001
+15V on B.Cu "B.Cu-+15V-1" (solid, remove dead copper, pour order 30995): 24 vertices, not listed, extent -5.202,4.307 -3.999,5.75
SOC_UART0_TX on B.Cu "B.Cu-/GPIO/SOC_UART0_TX" (solid, remove dead copper, pour order 30998): 24 vertices, not listed, extent -100.232,89.493 -98.623,91.102
VDC on B.Cu "B.Cu-VDC" (solid, remove dead copper, pour order 31001): 24 vertices, not listed, extent -1.693,4.999 -0.17,6.164
I2C2_SCL on B.Cu "B.Cu-/GPIO/I2C2_SCL" (solid, remove dead copper, pour order 31004): 24 vertices, not listed, extent -79.167,89.503 -77.589,91.104
+3V3 on B.Cu "B.Cu-+3V3-7" (solid, remove dead copper, pour order 31007): 24 vertices, not listed, extent -101.23,94.98 -99.879,96.68